# Altium PCB Adapter_JLink_EDU.PcbDoc
Units mm, origin at the board's own origin, x right, y up, seen from the top; angles counter-clockwise.
Board outline 23.62 x 23.54 mm, 2 copper layers (Top Layer, Bottom Layer), stack 1.621 mm thick; 11 components, 9 nets, 29 pads, 59 vias.
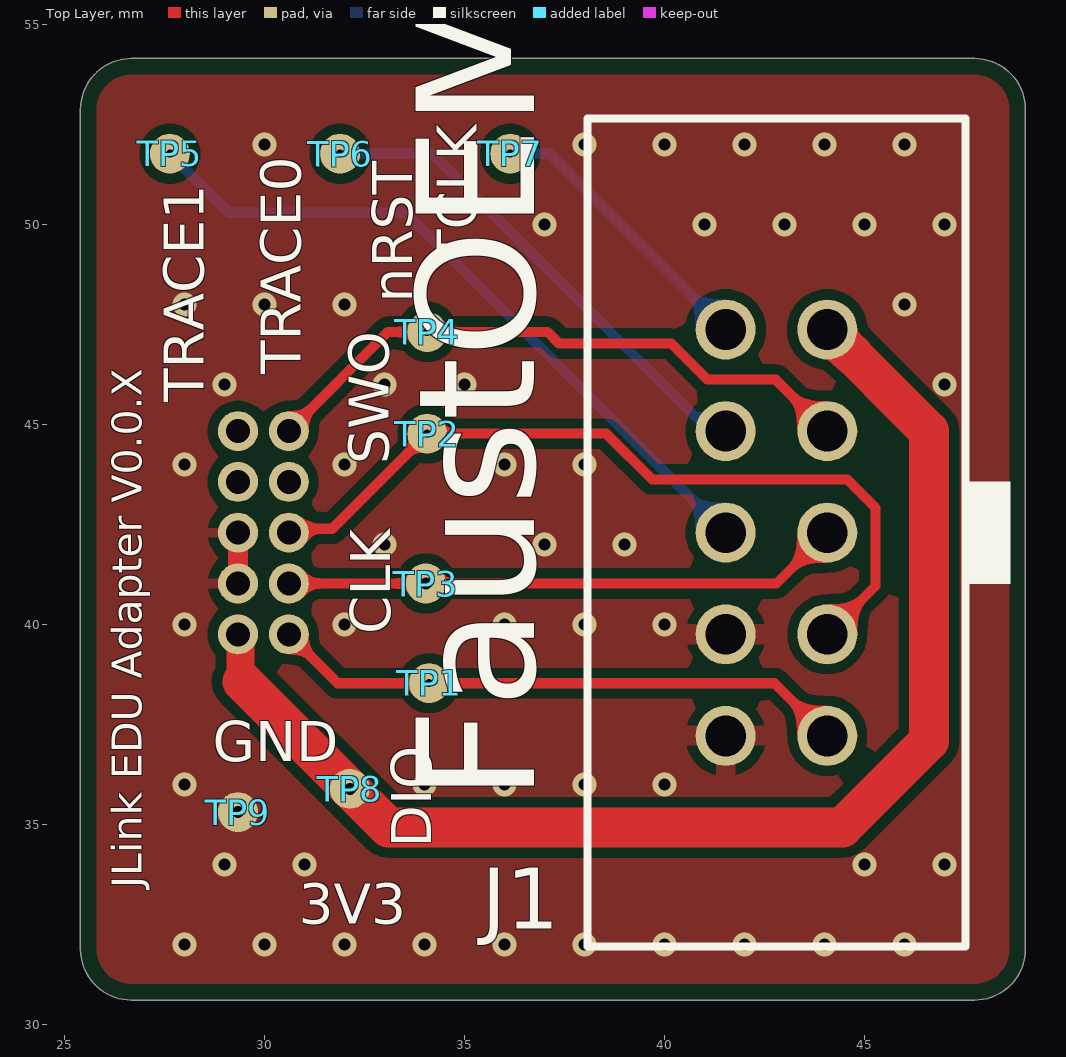
[diagram p0: Top Layer view]
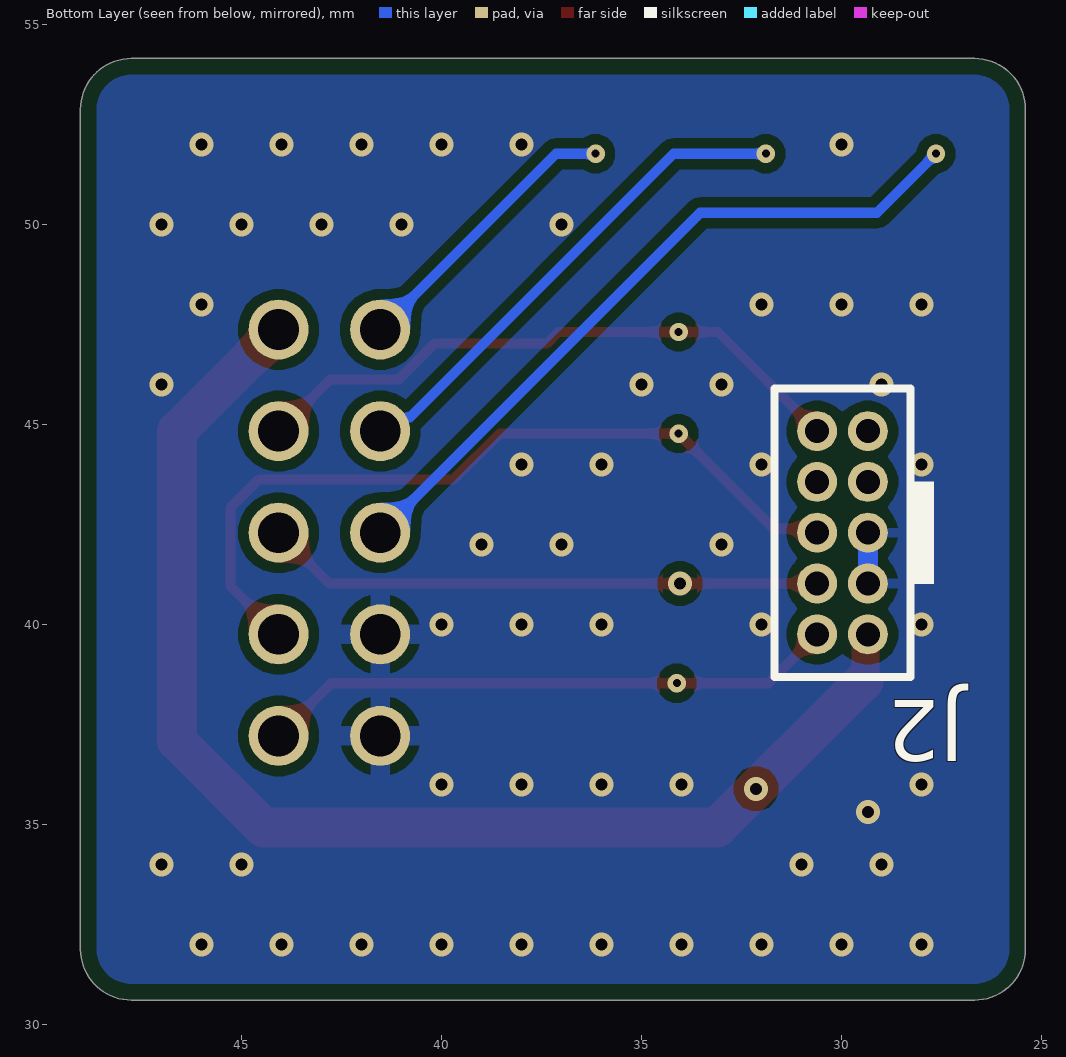
[diagram p1: Bottom Layer view, seen from below]

## Layer stack, top to bottom
Top Solder: solder mask 0.0102, Solder Resist, Dk 3.5
Top Layer: signal copper 0.0356
Dielectric 1: dielectric 1.55, FR-4, Dk 4.8
Bottom Layer: signal copper 0.0356
Bottom Solder: solder mask 0.0102, Solder Resist, Dk 3.5

## Board outline
25.4,31.877 25.4,52.877 cw(c26.67,52.877) 26.67,54.147 47.752,54.147 cw(c47.752,52.877) 49.022,52.877 49.022,31.877 cw(c47.752,31.877) 47.752,30.607 26.67,30.607 cw(c26.67,31.877)

## Design rules (kind name [scope] priority, off if disabled: settings)
BoardOutlineClearance BoardOutlineClearance_Component [IsComponent] p1: gap=0.254 ignorepadtopadclearanceinfootprint=FALSE except(0: Arc-SplitContinuation Track-SplitContinuation SMDPad-SplitContinuation THPad-SplitContinuation Via-SplitContinuation Fill-SplitContinuation Poly-SplitContinuation Region-SplitContinuation Text-SplitContinuation; 0.4: Track-OutlineEdge SMDPad-OutlineEdge THPad-OutlineEdge Via-OutlineEdge Fill-OutlineEdge Poly-OutlineEdge Region-OutlineEdge)
BoardOutlineClearance [All] p2: gap=0.254 ignorepadtopadclearanceinfootprint=FALSE except(0: Arc-SplitContinuation Track-SplitContinuation SMDPad-SplitContinuation THPad-SplitContinuation Via-SplitContinuation Fill-SplitContinuation Poly-SplitContinuation Region-SplitContinuation Text-SplitContinuation; 0.4: Track-OutlineEdge SMDPad-OutlineEdge THPad-OutlineEdge Via-OutlineEdge Fill-OutlineEdge Poly-OutlineEdge)
Clearance [All] p1: gap=0.254 ignorepadtopadclearanceinfootprint=FALSE except(0: Arc-Hole Track-Hole SMDPad-Hole THPad-Hole Via-Hole Fill-Hole Poly-Hole Region-Hole Text-Hole; 0.127: Arc-Arc Arc-Track Track-Track SMDPad-SMDPad; 0.2: SMDPad-THPad)
ComponentClearance [All] p1: gap=0.1 collisioncheckmode=3 verticalgap=0.254 showdistances=FALSE
HoleSize [All] p1: absolutevalues=TRUE maxlimit=6.3 minlimit=0.2 maxpercent=80.000 minpercent=20.000
HoleToHoleClearance [All] p1: gap=0.5 allowstackedmicrovias=TRUE
MinimumAnnularRing [All] p1: minimumring=0.13
MinimumSolderMaskSliver [All] p1: minsoldermaskwidth=0.05
PlaneConnect [All] p1: planeconnectstyle=Direct reliefexpansion=0.508 reliefentries=4 reliefconductorwidth=0.254 reliefairgap=0.254
PolygonConnect [All] p1: connectstyle=Direct reliefconductorwidth=0.254 reliefentries=4 polygonreliefangle="90 Angle" airgapwidth=0.254
RoutingVias [All] p1: holewidth=0.3 width=0.6 viastyle="Through Hole" minholewidth=0.3 minwidth=0.6 maxholewidth=6.3 maxwidth=6.3
SilkToSilkClearance [All] p1: silktosilkclearance=0
SilkToSolderMaskClearance [IsPad] p1: minsilkscreentomaskgap=0 clearancetoexposedcopper=TRUE
SolderMaskExpansion SolderMaskExpansion_via [isVia] p1: expansion=0.055 istentingtop=TRUE
SolderMaskExpansion SolderMaskExpansion_1 [All] p2: expansion=0.102 istentingtop=FALSE
Width [All] p1: maxlimit=1816.048 minlimit=0.127 preferedwidth=0.254 toplayer_maxwidth=1816.048 minimp=50.000000 maximp=50.000000 favimp=50.000000
23 further rules are at their usual default settings.

## Components (designator, comment, footprint, x,y, rotation, side; value= is the part's Value field where it differs from the comment)
J1 "TAG CONN 10" "CONN HDR RECPT 20 2.54 TH TAG CONNECT 10" 42.799,42.291 r180 top locked
J2 "20021311-00010T4LF" "CONN HDR PLUG 10 1.27mm JLink EDU" 29.972,42.291 r0 bottom locked
TP1 "1mm" TESTPOINT_SMT 34.114,38.529 r90 top
TP2 "1mm" TESTPOINT_SMT 34.068,44.768 r90 top
TP3 "1mm" TESTPOINT_SMT 34.034,41.021 r90 top
TP4 "1mm" TESTPOINT_SMT 34.068,47.308 r90 top
TP5 "1mm" TESTPOINT_SMT 27.635,51.766 r90 top
TP6 "1mm" TESTPOINT_SMT 31.889,51.766 r90 top
TP7 "1mm" TESTPOINT_SMT 36.144,51.766 r270 top
TP8 "1mm" TESTPOINT_SMT 32.134,35.89 r270 top
TP9 "1mm" TESTPOINT_SMT 29.337,35.306 r270 top

## Footprints (in the part's own frame and the unit in brackets; to place one, negate y for a bottom-side part, rotate by r counter-clockwise, add the part's x,y. Pads: shape width x height; smd on the part's side, far side on the other; paste and mask are expansions set on the pad)
"CONN HDR PLUG 10 1.27mm JLink EDU" [mm]
  round 1 hole 0.6: 1(-0.635,2.54) 2(0.635,2.54) 3(-0.635,1.27) 4(0.635,1.27) 5(-0.635,0) 6(0.635,0) 7(-0.635,-1.27) 8(0.635,-1.27) 9(-0.635,-2.54) 10(0.635,-2.54)
  silkscreen extent -2.29,-3.61 1.7,3.6, body extent -1.5,-3.41 1.5,3.4, height 4.31
"CONN HDR RECPT 20 2.54 TH TAG CONNECT 10" [mm]
  round 1.5 hole 1.02: 1(-1.27,5.08) 2(1.27,5.08) 3(-1.27,2.54) 4(1.27,2.54) 5(-1.27,0) 6(1.27,0) 7(-1.27,-2.54) 8(1.27,-2.54) 9(-1.27,-5.08) 10(1.27,-5.08)
  silkscreen extent -5.84,-10.35 4.73,10.35
TESTPOINT_SMT [mm] "testpoint smt"
  round 1 smd: 1(0,0)

## Part data
J1: library part "CONN HDR RECPT 10 2.54mm TH SWV", "Conn Shrouded Header HDR 10 POS 2.54mm Solder ST Thru-Hole", Color=Black, Manufacturer="On-Shore Technology", Manufacturer Part Number=302-S101, Supplier Part Number 1=ED1543-ND, Category=Connectors, ComponentLink1Description=https://datasheet.ciiva.com/732/302-sxxx-732946.pdf?src-supplier=Digi-Key, ComponentLink1URL=https://datasheet.ciiva.com/732/302-sxxx-732946.pdf?src-supplier=Digi-Key, Connector Type="Male Pin", Contact Plating=Gold, Contact Type="Male Pin", Mount="Through Hole", Number of Positions=10, Number of Rows=2, Packaging=Tray, Pitch=0.1inch, Pricing 1="1=0.29000, 10=0.24800, 100=0.19290, 500=0.16538, 1000=0.13781, 5000=0.11812, 10000=0.11025 (USD)", RoHS=Yes, Row Spacing=0.1inch, Series=302, Stock 1=61558, Supplier 1=Digi-Key, Termination=Solder
J2: library part "CONN HDR RECPT 10 1.27mm TH 20021311-00010T4LF", "Dual Row 10 Position 1.27 mm Board to Board Through Hole Female Socket Connector", Manufacturer 1="Amphenol ICC / FCI", Supplier Part Number 1=38AH4107, Category 1="Headers and Wire Housings", ComponentLink1Description=http://components.arrow.com/part/dataview/48963183S8522640N8314?src-supplier=Arrow+Electronics, ComponentLink1URL=http://components.arrow.com/part/dataview/48963183S8522640N8314?src-supplier=Arrow+Electronics, ComponentLink2Description=http://portal.fciconnect.com/Comergent/fci/drawing/20021311.pdf?src-supplier=Avnet, ComponentLink2URL=http://portal.fciconnect.com/Comergent/fci/drawing/20021311.pdf?src-supplier=Avnet, ComponentLink3Description=http://portal.fciconnect.com/Comergent//fci/drawing/20021311.pdf?src-supplier=Mouser, ComponentLink3URL=http://portal.fciconnect.com/Comergent//fci/drawing/20021311.pdf?src-supplier=Mouser, ComponentLink4Description=http://www.farnell.com/datasheets/1079639.pdf?src-supplier=Element14, ComponentLink4URL=http://www.farnell.com/datasheets/1079639.pdf?src-supplier=Element14, ComponentLink5Description=https://media.digikey.com/pdf/Data%20Sheets/FCI%20PDFs/Minitek%20127_Catalog.pdf?src-supplier=Digi-Key, ComponentLink5URL=https://media.digikey.com/pdf/Data%20Sheets/FCI%20PDFs/Minitek%20127_Catalog.pdf?src-supplier=Digi-Key, ComponentLink6Description=http://www.farnell.com/datasheets/2374175.pdf?src-supplier=Farnell, ComponentLink6URL=http://www.farnell.com/datasheets/2374175.pdf?src-supplier=Farnell, Description 1="Dual Row 10 Position 1.27 mm Board to Board Through Hole Female Socket Connector", Manufacturer Part Number 1=20021311-00010T4LF, RoHS 1=No, Supplier 1=Newark
TP1 TP2 TP3 TP4 TP5 TP6 TP7 TP8 TP9: library part "TP 1mm", "SMT testpoint"

## Via types
v1: diameter 0.6, hole 0.3, Top Layer to Bottom Layer, tented both sides, 53 vias
v2: diameter 0.46, hole 0.2, Top Layer to Bottom Layer, tented both sides, 6 vias

## Nets (pads, with @x,y where several pads share a name; then routed paths per layer and width w, separated by ;. In a path a pad name is that pad's centre, name@x,y a point inside that pad or via, vN(x,y) a via of type N, cw(c..) or ccw(c..) an arc to the next point about the centre after c; other vN are vias at no path point)
3V3: J1.9 J2.1 TP8.1 | length 32.1
  Top Layer w0.7: J2.1 29.394,39.694 29.394,38.629 29.447,38.576
  Top Layer w1: 29.447,38.576 33.098,34.925 44.45,34.925 46.609,37.084 46.609,44.831 J1.9
  other v1: 32.134,35.89
GND: J1.2 J1.4 J2.3 J2.5 TP9.1 | length 2.5
  Top Layer w0.5: J2.3 J2.5
  Bottom Layer w0.5: J2.3 J2.5
  other v1: 28,32 30,32 32,32 34,32 36,32 38,32 40,32 42,32 44,32 46,32 29,34 31,34 45,34 47,34 29.337,35.306 28,36 34,36 36,36 38,36 40,36 28,40 32,40 36,40 38,40 40,40 33,42 37,42 39,42 28,44 32,44 36,44 38,44 29,46 33,46 35,46 47,46 28,48 30,48 32,48 46,48 37,50 41,50 43,50 45,50 47,50 30,52 38,52 40,52 42,52 44,52 46,52
nRST: J1.7 J2.10 TP4.1 | length 15.5
  Top Layer w0.254: J2.10 33.084,47.308 37.078,47.308 37.368,47.018 40.176,47.018 41.076,46.118 42.783,46.118 J1.7
  other v2: 34.068,47.308
SWCLK: J1.5 J2.4 TP3.1 | length 14
  Top Layer w0.254: J2.4 42.799,41.021 J1.5
  other v1: 34.034,41.021
SWDIO: J1.1 J2.2 TP1.1 | length 14.5
  Top Layer w0.254: J2.2 31.829,38.529 42.751,38.529 J1.1
  other v2: 34.114,38.529
SWO: J1.3 J2.6 TP2.1 | length 20.1
  Top Layer w0.254: J2.6 30.706,42.39 31.69,42.39 v2(34.068,44.768) 38.544,44.768 39.688,43.624 44.563,43.624 45.276,42.911 45.276,40.958 J1.3
TRACE0: J1.8 TP6.1 | length 12.5
  Bottom Layer w0.254: v2(31.889,51.766) 34.197,51.766 40.785,45.178 40.845,45.178 41.192,44.831 J1.8
TRACE1: J1.6 TP5.1 | length 17.8
  Bottom Layer w0.254: v2(27.635,51.766) 29.108,50.292 33.528,50.292 J1.6
TRACE_CLK: J1.10 TP7.1 | length 7.2
  Bottom Layer w0.254: v2(36.144,51.766) 37.135,51.766 J1.10
pads on no net: J2.7 J2.8 J2.9

## Polygon pours and split planes (outlines as drawn)
GND on Bottom Layer "GND_L02_P001" (solid, remove dead copper, pour order 1): 25.4,25.4 49.022,25.4 49.022,59.055 25.4,59.055
GND on Top Layer "GND_L01_P000" (solid, remove dead copper, pour order 0): 25.4,25.4 49.022,25.4 49.022,59.055 25.4,59.055

## Silkscreen, mask and mechanical layers (free items; w line width, h text height)
Top Overlay:
  text "TCLK" at 35.306,49.022 h1 r90
  text "nRST" at 33.688,48.046 h1 r90
  text "TRACE0" at 30.9,46.255 h1 r90
  text "TRACE1" at 28.48,45.548 h1 r90
  text "SWO" at 33.104,44 h1 r90
  text "CLK" at 33.147,39.751 h1 r90
  text "GND" at 28.702,36.576 h1
  text "FaustOEM" at 37.719,35.56 h5.08 r90
  text "DIO" at 34.163,34.417 h1 r90
  text "JLink EDU Adapter V0.0.X" at 26.928,33.401 h0.75 r90
  text "3V3" at 30.861,32.512 h1
Board:
  the board outline again, w0.2
Fab Notes:
  lines w0.381: 104.149,36.703 114.56,36.703 138.176,36.703 160.014,36.703 176.52,36.703 190.994,36.703 ; 104.149,39.751 114.56,39.751 138.176,39.751 160.014,39.751 176.52,39.751 190.994,39.751 ; 104.149,42.799 114.56,42.799 138.176,42.799 160.014,42.799 176.52,42.799 190.994,42.799 ; 104.149,45.847 114.56,45.847 138.176,45.847 160.014,45.847 176.52,45.847 190.994,45.847 ; 104.149,48.895 114.56,48.895 138.176,48.895 160.014,48.895 176.52,48.895 190.994,48.895 ; 104.149,51.943 114.56,51.943 138.176,51.943 160.014,51.943 176.52,51.943 190.994,51.943 ; 104.149,54.991 190.994,54.991 ; 114.56,58.039 114.56,33.655 ; 138.176,58.039 138.176,33.655 ; 160.014,58.039 160.014,33.655 ; 176.52,58.039 176.52,33.655 ; 114.56,33.655 104.149,33.655 104.149,58.039 190.994,58.039 190.994,33.655 176.52,33.655 ; 114.56,33.655 138.176,33.655 ; 138.176,33.655 160.014,33.655 ; 160.014,33.655 176.52,33.655
  text "Layer" at 105.927,55.753 h1.52
  text "Name" at 116.338,55.753 h1.52
  text "Material" at 139.954,55.753 h1.52
  text "Thickness" at 161.792,55.753 h1.52
  text "Constant" at 178.298,55.753 h1.52
  text "Top Overlay" at 116.338,52.705 h1.52
  text "Top Solder" at 116.338,49.657 h1.52
  text "Solder Resist" at 139.954,49.657 h1.52
  text "0.010mm" at 161.792,49.657 h1.52
  text "3.5" at 178.298,49.657 h1.52
  text "1" at 105.927,46.609 h1.52
  text "Top Layer" at 116.338,46.609 h1.52
  text "0.036mm" at 161.792,46.609 h1.52
  text "Dielectric 1" at 116.338,43.561 h1.52
  text "FR-4" at 139.954,43.561 h1.52
  text "1.550mm" at 161.792,43.561 h1.52
  text "4.8" at 178.298,43.561 h1.52
  text "2" at 105.927,40.513 h1.52
  text "Bottom Layer" at 116.338,40.513 h1.52
  text "0.036mm" at 161.792,40.513 h1.52
  text "Bottom Solder" at 116.338,37.465 h1.52
  text "Solder Resist" at 139.954,37.465 h1.52
  text "0.010mm" at 161.792,37.465 h1.52
  text "3.5" at 178.298,37.465 h1.52
  text "Bottom Overlay" at 116.338,34.417 h1.52
  text "Total board thickness:" at 105.927,31.369 h1.52
  text "1.641mm" at 161.792,31.369 h1.52
Drill Drawing:
  circle w0.254: c91.128,78.317 r0.847
  lines w0.254: 90.281,81.703 90.704,81.703 91.128,81.28 91.551,81.703 91.974,81.703 91.551,82.127 91.974,82.55 91.551,82.55 91.128,82.973 90.704,82.55 90.281,82.55 90.704,82.127 90.281,81.703 ; 90.281,85.09 91.974,85.09 91.974,86.783 90.281,86.783 90.281,85.09 ; 90.281,90.593 91.974,90.593 91.128,88.9 90.281,90.593
  lines w0.381: 88.762,76.327 230.1,76.327 ; 88.762,91.567 230.1,91.567 ; 102.755,72.517 102.755,95.377 ; 116.467,72.517 116.467,95.377 ; 144.399,72.517 144.399,95.377 ; 157.248,72.517 157.248,95.377 ; 175.887,72.517 175.887,95.377 ; 213.975,72.517 213.975,95.377 ; 88.762,72.517 230.1,72.517 230.1,95.377 88.762,95.377 88.762,72.517
  text "Symbol" at 91.048,92.71 h1.83
  text "Count" at 103.898,92.71 h1.83
  text "Hole Size" at 117.61,92.71 h1.83
  text "Plated" at 145.542,92.71 h1.83
  text "Hole Type" at 158.391,92.71 h1.83
  text "Drill Layer Pair" at 177.03,92.71 h1.83
  text "Via/Pad" at 215.118,92.71 h1.83
  text "6" at 103.898,88.9 h1.52
  text "0.200mm (7.87mil)" at 117.61,88.9 h1.52
  text "PTH" at 145.542,88.9 h1.52
  text "Round" at 158.391,88.9 h1.52
  text "Top Layer - Bottom Layer" at 177.03,88.9 h1.52
  text "Via" at 215.118,88.9 h1.52
  text "53" at 103.898,85.09 h1.52
  text "0.300mm (11.81mil)" at 117.61,85.09 h1.52
  text "PTH" at 145.542,85.09 h1.52
  text "Round" at 158.391,85.09 h1.52
  text "Top Layer - Bottom Layer" at 177.03,85.09 h1.52
  text "Via" at 215.118,85.09 h1.52
  text "10" at 103.898,81.28 h1.52
  text "0.600mm (23.62mil)" at 117.61,81.28 h1.52
  text "PTH" at 145.542,81.28 h1.52
  text "Round" at 158.391,81.28 h1.52
  text "Top Layer - Bottom Layer" at 177.03,81.28 h1.52
  text "Pad" at 215.118,81.28 h1.52
  text "10" at 103.898,77.47 h1.52
  text "1.020mm (40.16mil)" at 117.61,77.47 h1.52
  text "PTH" at 145.542,77.47 h1.52
  text "Round" at 158.391,77.47 h1.52
  text "Top Layer - Bottom Layer" at 177.03,77.47 h1.52
  text "Pad" at 215.118,77.47 h1.52
  text "79 Total" at 103.898,73.66 h1.52

## Dimensions
25.4,52.877 to 49.022,52.877 on Fab Notes
47.752,54.147 to 47.752,30.607 on Fab Notes